# EAGLE board Micro DAQ Board.8 (EAGLE 5.06)
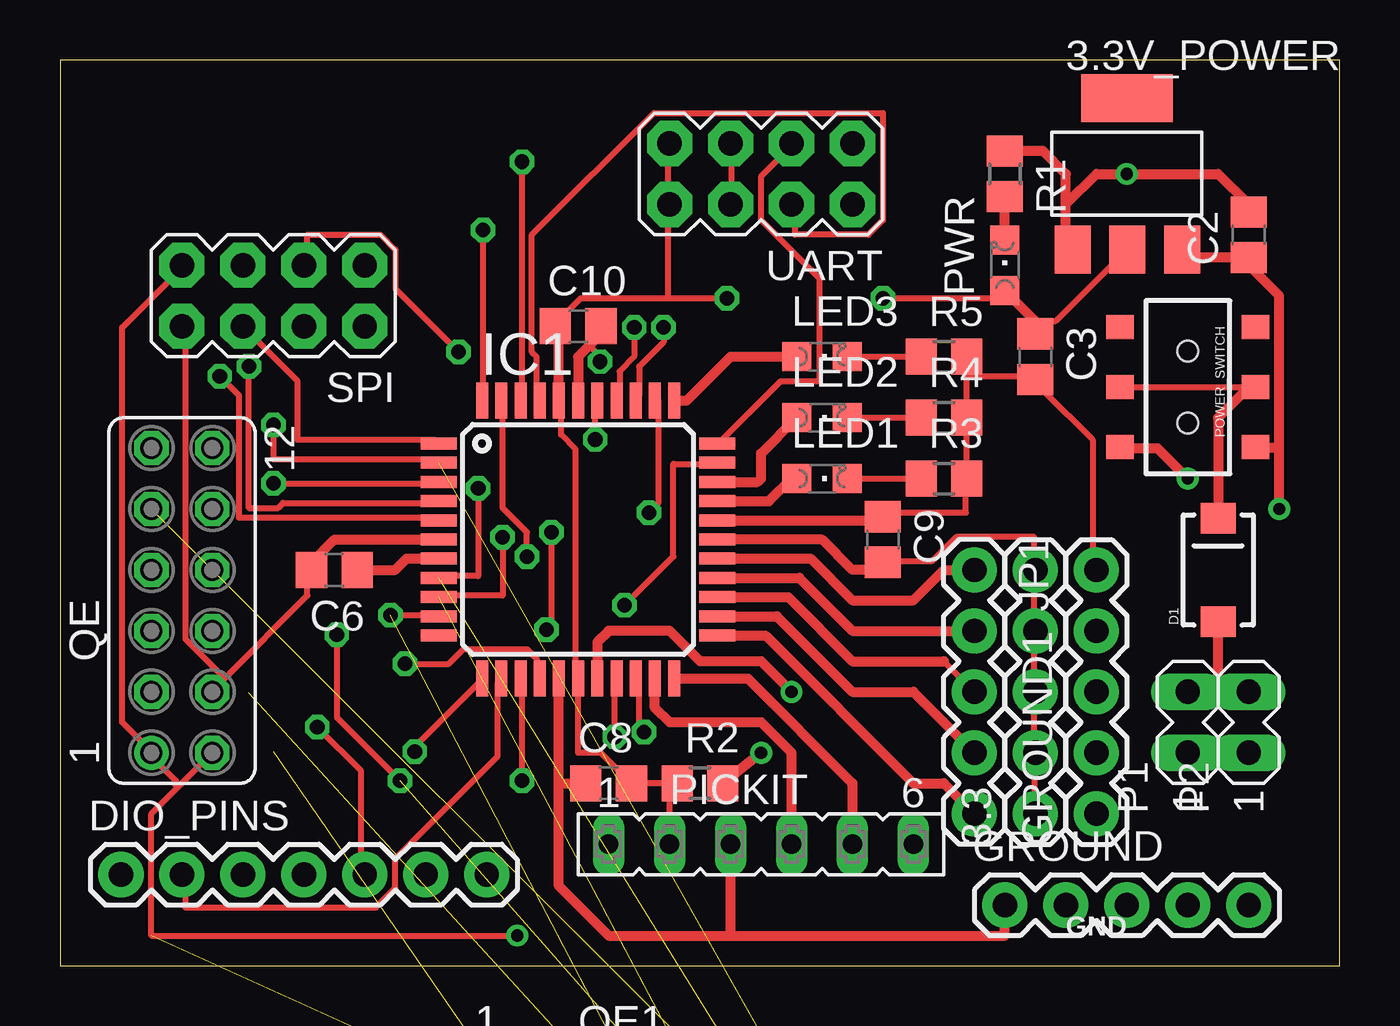
[diagram p0: board, top side]
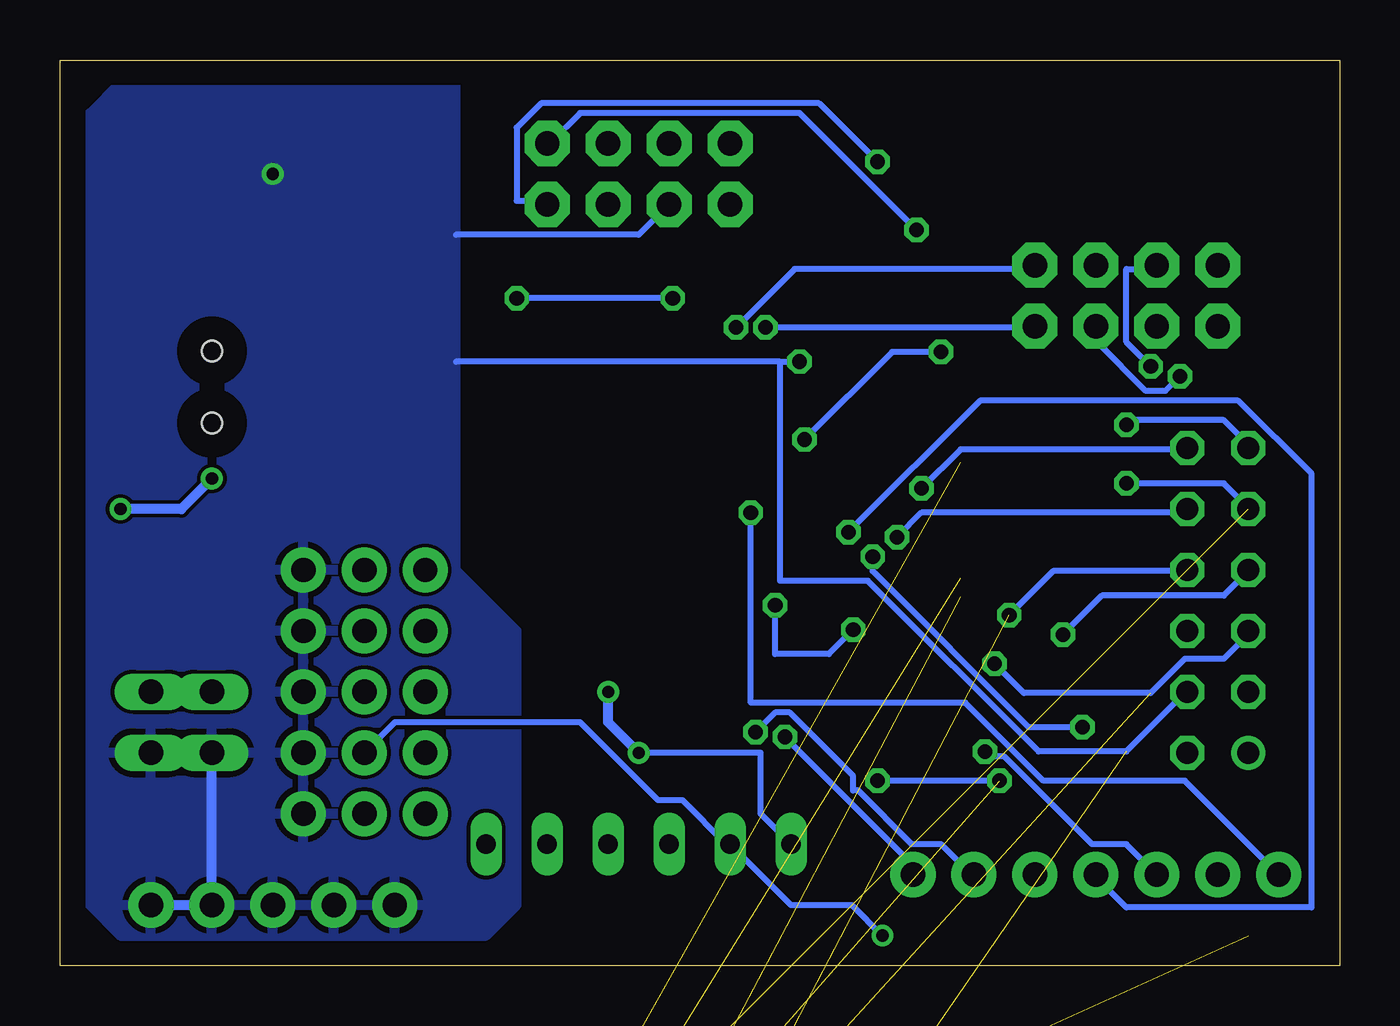
[diagram p1: board, bottom side, seen from below]

Size 53.32 x 37.77 mm. Coordinates in mm from the lower left corner, seen from the top.
Outline: 0,0 53.32,0 53.32,37.77 0,37.77 0,0
Copper layers (1*16): Top 0.035mm / dielectric 1.5mm / Bottom 0.035mm
Design rules "default *": minimum track width 10mil, minimum drill 24mil, track to track 6mil, track to pad 8mil, pad to pad 8mil, via to via 8mil, smd to smd 8mil, copper to edge 40mil, drill to drill 8mil, minimum pad ring 10mil, minimum via ring 8mil, stop-mask expansion 4mil, vias tented up to drill 0mil, thermal gap 10mil

## Footprints (pad centres in the part's own frame; a part is rotated, then mirrored left to right if it is on the bottom)
1X05 = drill 1.016 pad 1.88 round: 1 0,0; 2 2.54,0; 3 5.08,0; 4 7.62,0; 5 10.16,0
SOT223 = smd 1.499 x 2.007: 1 -2.261,-3.15; 2 0.025,-3.15; 3 2.311,-3.15 | smd 3.81 x 2.007: 4 0,3.15
C0805 = smd 1.3 x 1.5: 1 -0.95,0; 2 0.95,0
SMA-DIODE = smd 1.27 x 1.47: A -2.15,0; C 2.15,0
1X07 = drill 1.016 pad 1.88 round: 1 0,0; 2 2.54,0; 3 5.08,0; 4 7.62,0; 5 10.16,0; 6 12.7,0; 7 15.24,0
TQFP44 = smd 1.5 x 0.5: 1 -5.8,4; 2 -5.8,3.2; 3 -5.8,2.4; 4 -5.8,1.6; 5 -5.8,0.8; 6 -5.8,0; 7 -5.8,-0.8; 8 -5.8,-1.6; 9 -5.8,-2.4; 10 -5.8,-3.2; 11 -5.8,-4; 23 5.8,-4; 24 5.8,-3.2; 25 5.8,-2.4; 26 5.8,-1.6; 27 5.8,-0.8; 28 5.8,0; 29 5.8,0.8; 30 5.8,1.6; 31 5.8,2.4; 32 5.8,3.2; 33 5.8,4 | smd 0.5 x 1.5: 12 -4,-5.8; 13 -3.2,-5.8; 14 -2.4,-5.8; 15 -1.6,-5.8; 16 -0.8,-5.8; 17 0,-5.8; 18 0.8,-5.8; 19 1.6,-5.8; 20 2.4,-5.8; 21 3.2,-5.8; 22 4,-5.8; 34 4,5.8; 35 3.2,5.8; 36 2.4,5.8; 37 1.6,5.8; 38 0.8,5.8; 39 0,5.8; 40 -0.8,5.8; 41 -1.6,5.8; 42 -2.4,5.8; 43 -3.2,5.8; 44 -4,5.8
CHIPLED_0805 = smd 1.2 x 1.2: A 0,-1.05; C 0,1.05
MA02-1 = drill 1.016 long: 1 -1.27,0; 3 1.27,0
FE06 = drill 0.813 long: 1 -6.35,0; 2 -3.81,0; 3 -1.27,0; 4 1.27,0; 5 3.81,0; 6 6.35,0
AYZ0202 = smd 1 x 1.15: 1 -2.5,2.825; 2 0,2.825; 3 2.5,2.825; 4 -2.5,-2.825; 5 0,-2.825; 6 2.5,-2.825 | hole 0.85: 1.5,0; -1.5,0
FE06-2 = drill 0.914 round: 1 -6.35,1.27 | drill 0.914 octagon: 2 -6.35,-1.27; 3 -3.81,1.27; 4 -3.81,-1.27; 5 -1.27,1.27; 6 -1.27,-1.27; 7 1.27,1.27; 8 1.27,-1.27; 9 3.81,1.27; 10 3.81,-1.27; 11 6.35,1.27; 12 6.35,-1.27
R0805 = smd 1.3 x 1.5: 1 -0.95,0; 2 0.95,0
2X4 = drill 1.016 pad 1.88 octagon: 1 -3.81,-1.27; 2 -3.81,1.27; 3 -1.27,-1.27; 4 -1.27,1.27; 5 1.27,-1.27; 6 1.27,1.27; 7 3.81,-1.27; 8 3.81,1.27

## Placement (x,y rotation side)
3.3  [1X05]  40.64,6.35 90 top
3.3V_POWER  REG1117  [SOT223]  44.45,33.02 0 top
C2  10uF  [C0805]  49.53,30.48 90 top
C3  .1uF  [C0805]  40.64,25.4 270 top
C6  10uF  [C0805]  11.43,16.51 180 top
C8  [C0805]  22.86,7.62 0 top
C9  [C0805]  34.29,17.78 270 top
C10  [C0805]  21.59,26.67 0 top
D1  DIODE-SCHOTTKY_  [SMA-DIODE]  48.26,16.51 90 top
DIO_PINS  [1X07]  2.54,3.81 0 top
GROUND  [1X05]  39.37,2.54 0 top
GROUND1  [1X05]  43.18,6.35 90 top
IC1  DSPIC33FJ128MC804-PT  [TQFP44]  21.59,17.78 0 top
JP1  [1X05]  38.1,16.51 270 top
LED1  [CHIPLED_0805]  31.75,20.32 270 top
LED2  [CHIPLED_0805]  31.75,22.86 270 top
LED3  [CHIPLED_0805]  31.75,25.4 270 top
P1  MA02-1  [MA02-1]  46.99,10.16 90 top
P2  MA02-1  [MA02-1]  49.53,10.16 90 top
PICKIT  [FE06]  29.21,5.08 0 top
POWER_SWITCH  AYZ0202  [AYZ0202]  46.99,24.13 270 top
PWR  [CHIPLED_0805]  39.37,29.21 0 top
QE  [FE06-2]  5.08,15.24 90 top
QE1  [FE06-2]  24.13,-6.35 0 top  (outside the outline)
R1  330E  [R0805]  39.37,33.02 270 top
R2  4.7k  [R0805]  26.67,7.62 0 top
R3  330E  [R0805]  36.83,20.32 0 top
R4  330E  [R0805]  36.83,22.86 0 top
R5  330E  [R0805]  36.83,25.4 0 top
SPI  [2X4]  8.89,27.94 180 top
UART  [2X4]  29.21,33.02 180 top

## Library data of the parts
3.3 D1 DIO_PINS GROUND GROUND1 JP1 POWER_SWITCH SPI UART = SparkFun
3.3V_POWER = burr-brown
C2 C3 C6 C8-C10 R1-R5 = rcl
IC1 = microchip-dspic33fjxxmc
LED1-LED3 PWR = led
P1 P2 = Pranjal
PICKIT QE QE1 = con-lsta

## Nets
3.3V: 3.3.1 3.3.2 3.3.3 3.3.4 3.3.5 3.3V_POWER.2 C3.1 C8.2 C9.2 C10.1 IC1.17 IC1.28 IC1.40 PICKIT.2 PWR.A QE1.1 QE1.2 QE.1 QE.2 R2.1 SPI.7 UART.7 UART.8
AN4: IC1.23 JP1.5
AN5: IC1.24 JP1.4
AN6: IC1.25 JP1.3
AN7: IC1.26 JP1.2
AN8: IC1.27 JP1.1
DIO1: DIO_PINS.7 IC1.19
DIO2: DIO_PINS.6 IC1.20
DIO3: DIO_PINS.5 IC1.43
DIO4: DIO_PINS.4 IC1.32
DIO5: DIO_PINS.3 IC1.12
DIO6: DIO_PINS.2 IC1.13
DIO7: DIO_PINS.1 IC1.35
DIR1: IC1.8 QE1.12 QE.12
DIR2: IC1.2 QE1.11 QE.11
GND: 3.3V_POWER.1 C2.2 C3.2 C6.2 C8.1 C9.1 C10.2 GROUND1.1 GROUND1.2 GROUND1.3 GROUND1.4 GROUND1.5 GROUND.1 GROUND.2 GROUND.3 GROUND.4 GROUND.5 IC1.6 IC1.16 IC1.29 IC1.39 P1.1 P2.1 PICKIT.3 QE1.4 QE.4 R1.1 R3.2 R4.2 R5.2 SPI.8 UART.5 UART.6
INDEX1: IC1.11
INDEX2: IC1.15 QE1.5 QE.5
MCLR: IC1.18 PICKIT.1 R2.2
N$1: IC1.30 LED1.A
N$2: LED1.C R3.1
N$3: IC1.31 LED2.A
N$4: LED2.C R4.1
N$5: LED3.C R5.1
N$6: IC1.34 LED3.A
N$7: D1.A P1.3 P2.3
N$8: D1.C POWER_SWITCH.2 POWER_SWITCH.5
N$15: PWR.C R1.2
PGEC1: IC1.22 PICKIT.5
PGED1: IC1.21 PICKIT.4
POWER: 3.3V_POWER.3 C2.1 POWER_SWITCH.3 POWER_SWITCH.6
QE1A: IC1.9 QE1.10 QE.10
QE1B: IC1.10 QE1.8 QE.8
QE2A: IC1.3 QE1.9 QE.9
QE2B: IC1.14 QE1.7 QE.7
SPI1_SCK(INPUT): IC1.37 SPI.2
SPI1_SCK(OUTPUT): IC1.4 SPI.5
SPI1_SDI: IC1.38 SPI.3
SPI1_SDO: IC1.1 SPI.6
SPI1_SS1(INPUT): IC1.36 SPI.1
SPI1_SS1(OUTPUT): IC1.5 SPI.4
U1RX: IC1.33 UART.3
U1TX: IC1.44 UART.1
U2RX: IC1.41 UART.4
U2TX: IC1.42 UART.2
VCAP/VDDCORE: C6.1 IC1.7

## Tracks (layer width: path | path; a pad name or v marks a point on that pad's centre or on a via)
3.3V  (via drill 0.51, 0.61)  (2 unrouted)
  Top 0.254: 3.3.1 40.59,6.5 40.59,8.74 3.3.2 40.59,8.94 40.59,11.38 3.3.3 40.59,11.58 40.59,13.82 3.3.4 40.59,14.02 40.59,16.46 3.3.5 40.59,16.66 40.59,17.88 37.34,17.88 36.32,16.87 34.29,16.87 C9.2 | 40.64,26.89 41.49,26.89 3.3V_POWER.2 | 25.35,27.84 21.69,27.84 20.68,26.82 C10.1 | 25.35,27.84 v27.79,27.84 | v34.29,27.84 39.37,27.84 PWR.A | 25.72,5.4 25.55,5.28 25.55,5.08 PICKIT.2 25.4,7.3 R2.1 C8.2 22.54,8.89 21.59,8.89 21.59,11.43 21.69,11.58 21.69,11.79 IC1.17 21.49,11.99 21.49,21.54 20.88,22.15 20.88,22.96 IC1.40 | 4.9,7.44 3.81,6.35 3.81,1.27 v19.05,1.27 | 4.9,7.44 QE.2 | 4.9,7.44 4.83,7.52 4.83,7.72 3.81,8.74 QE.1 3.81,8.94 2.59,10.16 2.59,26.62 5.03,29.06 SPI.7 | UART.7 25.35,34.14 25.35,31.9 UART.8 25.35,31.7 25.35,27.84
  Top 0.406: C3.1 40.64,26.89 PWR.A | 20.79,23.01 IC1.40 20.79,26.52 C10.1 | IC1.28 31.75,17.78 33.02,16.51 33.97,16.51 C9.2
  Bottom 0.254: v27.79,27.84 v34.29,27.84 | v19.05,1.27 20.32,2.54 22.86,2.54 PICKIT.2 25.55,5.08 27.38,6.91 28.4,6.91 31.65,10.16 39.37,10.16 3.3.2
AN4
  Top 0.406: IC1.23 29.4,13.78 35.56,7.62 36.83,7.62 JP1.5
AN5
  Top 0.406: IC1.24 29.87,14.58 33.02,11.43 35.56,11.43 JP1.4
AN6
  Top 0.254: 36.83,12.7 JP1.3
  Top 0.406: IC1.25 30.34,15.38 33.02,12.7 36.83,12.7
AN7
  Top 0.406: IC1.26 30.81,16.18 33.02,13.97 JP1.2
AN8
  Top 0.406: IC1.27 31.28,16.98 33.02,15.24 35.56,15.24 36.83,16.51 JP1.1
DIO1  (via drill 0.61)
  Top 0.254: v23.11,9.55 23.11,11.79 IC1.19
  Bottom 0.254: v23.11,9.55 17.83,4.27 17.83,3.86 DIO_PINS.7
DIO2  (via drill 0.61)
  Top 0.254: v24.33,9.75 24.13,9.96 24.13,11.79 IC1.20
  Bottom 0.254: v24.33,9.75 23.52,10.57 22.91,10.57 20.27,7.93 20.27,7.32 20.07,7.32 17.83,5.08 16.61,5.08 15.39,3.86 DIO_PINS.6
DIO3  (via drill 0.61)
  Top 0.254: v19.46,17.07 19.46,18.09 18.44,19.1 18.44,23.57 IC1.43 | v10.72,9.96 12.55,8.13 12.55,3.86 DIO_PINS.5
  Bottom 0.254: v19.46,17.07 19.46,16.46 12.95,9.96 v10.72,9.96
DIO4  (via drill 0.61)
  Top 0.254: v23.52,15.04 25.55,17.07 25.55,20.93 27.38,20.93 IC1.32 | v20.27,14.02 20.47,14.22 v20.47,18.09
  Bottom 0.254: v23.52,15.04 23.52,13.01 21.29,13.01 v20.27,14.02 | v20.47,18.09 14.99,23.57 4.22,23.57 1.17,20.52 1.17,2.44 8.89,2.44 10.11,3.66 DIO_PINS.4
DIO5  (via drill 0.61)
  Top 0.254: v14.78,8.94 14.78,9.14 17.42,11.79 IC1.12
  Bottom 0.254: v14.78,8.94 14.58,8.74 13.97,8.74 10.31,5.08 8.89,5.08 DIO_PINS.3
DIO6
  Top 0.254: IC1.13 18.24,11.79 18.24,8.74 13.97,4.47 13.97,3.25 13.16,2.44 5.23,2.44 5.23,3.66 DIO_PINS.2
DIO7  (via drill 0.61)
  Top 0.254: v24.54,18.9 24.94,19.3 24.94,23.57 IC1.35
  Bottom 0.254: v24.54,18.9 24.54,10.97 15.6,10.97 12.34,7.72 6.45,7.72 DIO_PINS.1
DIR1  (via drill 0.61)  (1 unrouted)
  Top 0.254: v17.42,19.91 17.42,16.26 15.8,16.26 IC1.8
  Bottom 0.254: v17.42,19.91 15.8,21.54 6.45,21.54 QE.12
DIR2  (via drill 0.61)  (1 unrouted)
  Top 0.254: v8.89,22.55 8.89,21.13 15.6,21.13 IC1.2
  Bottom 0.254: v8.89,22.55 8.69,22.76 4.83,22.76 3.81,21.74 QE.11
GND  (via drill 0.51, 0.61)  (1 unrouted)
  Top 0.254: 37.78,24.59 R4.2 R3.2 37.74,20.32 37.74,18.9 34.29,18.9 C9.1 | 37.78,24.59 R5.2 | IC1.6 15.6,17.88 15.39,17.88 15.24,17.78 | 37.78,24.59 40.59,24.59 C3.2 41,23.98 43.03,21.95 43.03,16.66 GROUND1.5 | 37.78,24.59 37.74,24.59 | UART.6 27.99,31.9 27.99,34.14 UART.5 | v22.5,25.2 22.5,25.4 22.05,25.86 | 6.86,11.99 10.31,15.44 10.31,16.46 C6.2 | 6.86,11.99 6.45,11.58 QE.4 | 6.86,11.99 5.23,13.61 5.23,26.62 SPI.8
  Top 0.406: P1.1 P2.1 | C2.2 49.53,31.75 48.26,33.02 v44.45,33.02 43.18,33.02 41.91,31.75 | 41.91,31.75 41.91,30.15 3.3V_POWER.1 | R1.1 40.96,33.97 41.91,33.02 41.91,31.75 | 20.79,7.62 IC1.16 | 20.79,7.62 C8.1 | IC1.29 34.14,18.58 C9.1 | 27.94,1.27 PICKIT.3 | C6.2 10.48,16.83 11.43,17.78 15.24,17.78 | 20.79,7.62 20.79,3.34 22.86,1.27 27.94,1.27 | 27.94,1.27 39.37,1.27 GROUND.1 | C3.2 40.96,24.13 | IC1.39 21.59,25.4 22.05,25.86 22.54,26.35 C10.2
  Bottom 0.254: 23.32,25.2 v22.5,25.2 | 23.32,25.2 36.83,25.2 | UART.6 29.21,30.48 36.83,30.48 | 23.32,25.2 23.32,16.05 19.66,16.05 12.55,8.94 8.89,8.94 6.45,11.38 QE.4
  Bottom 0.406: GROUND.5 GROUND.4 P1.1
  pour Bottom: 52.07,17.78 52.07,2.54 50.8,1.27 35.56,1.27 34.29,2.54 34.29,13.97 36.83,16.51 36.83,36.83 50.8,36.83 52.07,35.56
INDEX2  (via drill 0.61)  (1 unrouted)
  Top 0.254: v14.38,12.6 16.21,12.6 16.82,13.21 19.46,13.21 19.86,12.8 19.86,11.99 IC1.15
  Bottom 0.254: v14.38,12.6 13.16,11.38 7.87,11.38 6.45,12.8 4.83,12.8 3.81,13.82 QE.5
MCLR  (via drill 0.51)
  Top 0.406: IC1.18 22.39,13.5 22.86,13.97 25.4,13.97 26.67,12.7 29.21,12.7 v30.48,11.43 | v29.21,8.89 R2.2
  Bottom 0.254: PICKIT.1 24.13,6.35 24.13,8.89 v29.21,8.89
  Bottom 0.406: v30.48,11.43 30.48,10.16 v29.21,8.89
N$1
  Top 0.406: IC1.30 29.54,19.38 30.48,20.32 LED1.A
N$2
  Top 0.254: LED1.C R3.1
N$3
  Top 0.406: IC1.31 29.07,20.18 29.21,20.32 29.21,21.37 LED2.A
N$4
  Top 0.254: LED2.C R4.1
N$5
  Top 0.254: LED3.C R5.1
N$6
  Top 0.406: IC1.34 26.12,23.58 27.94,25.4 LED3.A
N$7
  Top 0.406: P1.3 48.26,11.43 | 48.26,11.43 P2.3 | 48.26,11.43 D1.A
N$8
  Top 0.254: 49.53,24.13 POWER_SWITCH.2 POWER_SWITCH.5
  Top 0.406: 49.53,24.13 48.26,22.86 D1.C
N$15
  Top 0.406: PWR.C R1.2
PGEC1
  Top 0.406: IC1.22 28.66,11.98 33.02,7.62 PICKIT.5
PGED1
  Top 0.406: IC1.21 24.79,10.77 25.4,10.16 29.21,10.16 30.48,8.89 PICKIT.4
POWER  (via drill 0.51)
  Top 0.406: 3.3V_POWER.3 47.1,29.53 C2.1 49.53,29.21 50.8,27.94 50.8,21.59 | 50.8,21.59 49.85,21.59 POWER_SWITCH.3 | POWER_SWITCH.6 44.21,21.59 45.72,21.59 v46.99,20.32 | v50.8,19.05 50.8,21.59
  Bottom 0.406: v46.99,20.32 48.26,19.05 v50.8,19.05
QE1A  (via drill 0.61)  (1 unrouted)
  Top 0.254: v18.44,17.88 18.44,15.44 15.8,15.44 IC1.9
  Bottom 0.254: v18.44,17.88 17.42,18.9 6.45,18.9 QE.10
QE1B  (via drill 0.61)  (1 unrouted)
  Top 0.254: v13.77,14.63 15.6,14.63 IC1.10
  Bottom 0.254: v13.77,14.63 11.94,16.46 6.45,16.46 QE.8
QE2A  (via drill 0.61)  (1 unrouted)
  Top 0.254: v8.89,20.12 15.6,20.12 IC1.3
  Bottom 0.254: v8.89,20.12 4.83,20.12 3.81,19.1 QE.9
QE2B  (via drill 0.61)  (1 unrouted)
  Top 0.254: v19.25,7.72 19.25,11.79 IC1.14 | v14.17,7.72 11.53,10.36 v11.53,13.82
  Bottom 0.254: v14.17,7.72 v19.25,7.72 | v11.53,13.82 9.91,15.44 4.83,15.44 3.81,16.46 QE.7
SPI1_SCK(INPUT)  (via drill 0.61)
  Top 0.254: v23.93,26.62 23.93,25.4 23.32,24.79 23.32,23.77 IC1.37
  Bottom 0.254: v23.93,26.62 12.75,26.62 SPI.2
SPI1_SCK(OUTPUT)  (via drill 0.61)
  Top 0.254: v7.87,24.99 7.87,19.1 9.09,19.1 9.3,19.3 15.6,19.3 IC1.4
  Bottom 0.254: v7.87,24.99 8.89,26.01 8.89,29.06 7.67,29.06 SPI.5
SPI1_SDI  (via drill 0.61)
  Top 0.254: v22.3,21.95 22.3,23.57 IC1.38 | v16.61,25.6 13.97,28.25 13.97,29.87 13.36,30.48 10.31,30.48 10.31,29.26 SPI.3
  Bottom 0.254: v22.3,21.95 18.64,25.6 v16.61,25.6
SPI1_SDO
  Top 0.254: IC1.1 15.6,21.95 9.91,21.95 9.91,24.38 SPI.6
SPI1_SS1(INPUT)  (via drill 0.61)
  Top 0.254: v25.15,26.62 25.15,26.01 24.13,24.99 24.13,23.77 IC1.36
  Bottom 0.254: v25.15,26.62 22.71,29.06 12.75,29.06 SPI.1
SPI1_SS1(OUTPUT)  (via drill 0.61)
  Top 0.254: v6.66,24.59 7.47,23.77 7.47,18.69 15.6,18.69 IC1.5
  Bottom 0.254: v6.66,24.59 7.26,23.98 8.08,23.98 10.11,26.01 10.11,26.62 SPI.4
U1RX
  Top 0.254: IC1.33 27.58,21.95 30.02,24.38 31.65,24.38 31.65,28.65 29.21,31.09 29.21,32.92 30.43,34.14 UART.3
U1TX  (via drill 0.61)
  Top 0.254: v17.63,30.68 17.63,23.77 IC1.44
  Bottom 0.254: v17.63,30.68 22.5,35.56 31.65,35.56 32.87,34.34 UART.1
U2RX
  Top 0.254: IC1.41 19.86,23.77 19.86,25.4 19.66,25.6 19.66,30.48 24.74,35.56 34.29,35.56 34.29,31.09 33.68,30.48 30.63,30.48 30.63,31.7 UART.4
U2TX  (via drill 0.61)
  Top 0.254: v19.25,33.53 19.25,23.77 IC1.42
  Bottom 0.254: v19.25,33.53 21.69,35.97 33.27,35.97 34.29,34.95 34.29,31.9 33.07,31.9 UART.2
VCAP/VDDCORE
  Top 0.406: IC1.7 14.44,16.98 13.97,16.51 C6.1 12.7,16.19

## Text on the board
tPlace: GND
_tsilk: SPI | UART | U2 | GND | Manish Sharma | Flight Lab, IITK | U1 | GND | L3 | QE2 | QE1 | L2 | DIR | L1 | A | AN8 | B | AN7 | IN | AN6 | + | GND | AN5 | 3.3 | DIO | AN4 | - | 35 | 13 | 12 | 32 | 43 | 20 | 19 | PICKIT